# Altium PCB DRA818_Ham_module_3.PcbDoc
Units mil, origin at the board's own origin, x right, y up, seen from the top; angles counter-clockwise.
Board outline 3505 x 2360 mil, 4 copper layers (Component Side, Signal Layer 1, Power Plane, Solder Side), stack 33.234 mil thick; 78 components, 59 nets, 301 pads, 107 vias.
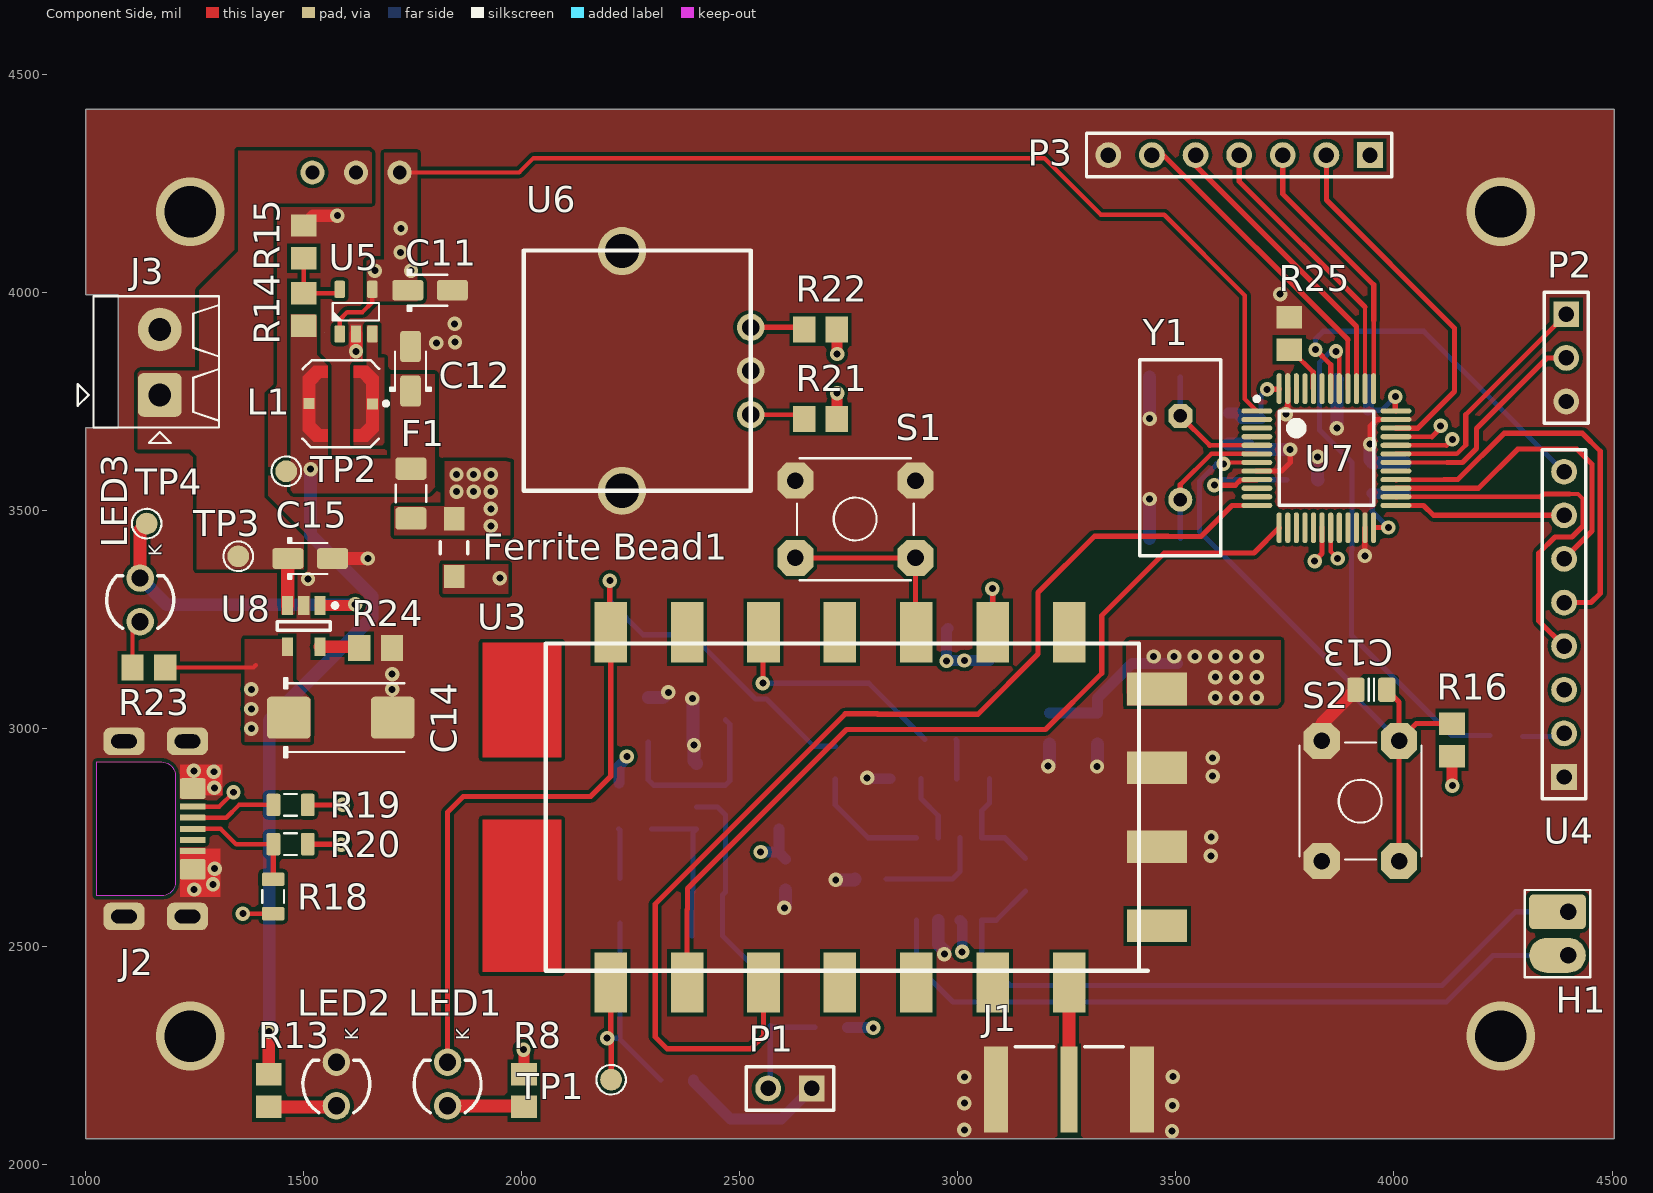
[diagram p0: Component Side view]
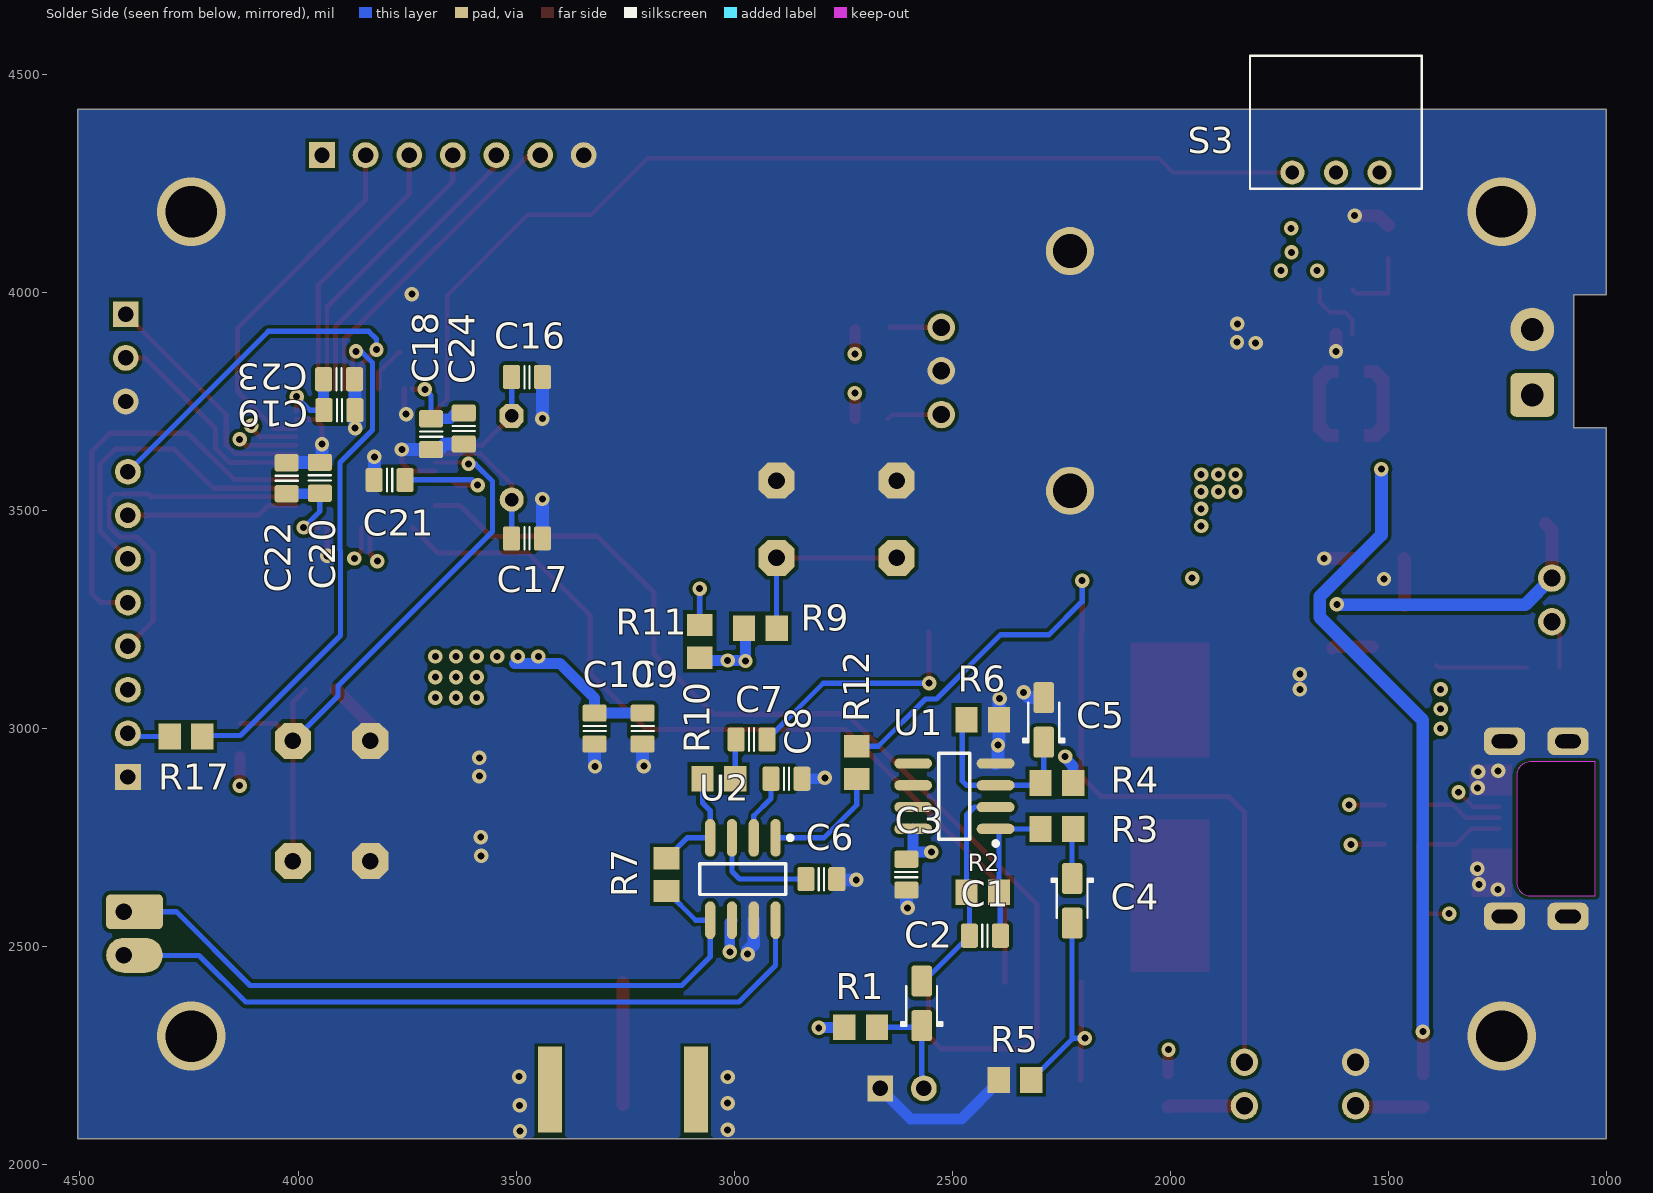
[diagram p1: Solder Side view, seen from below]
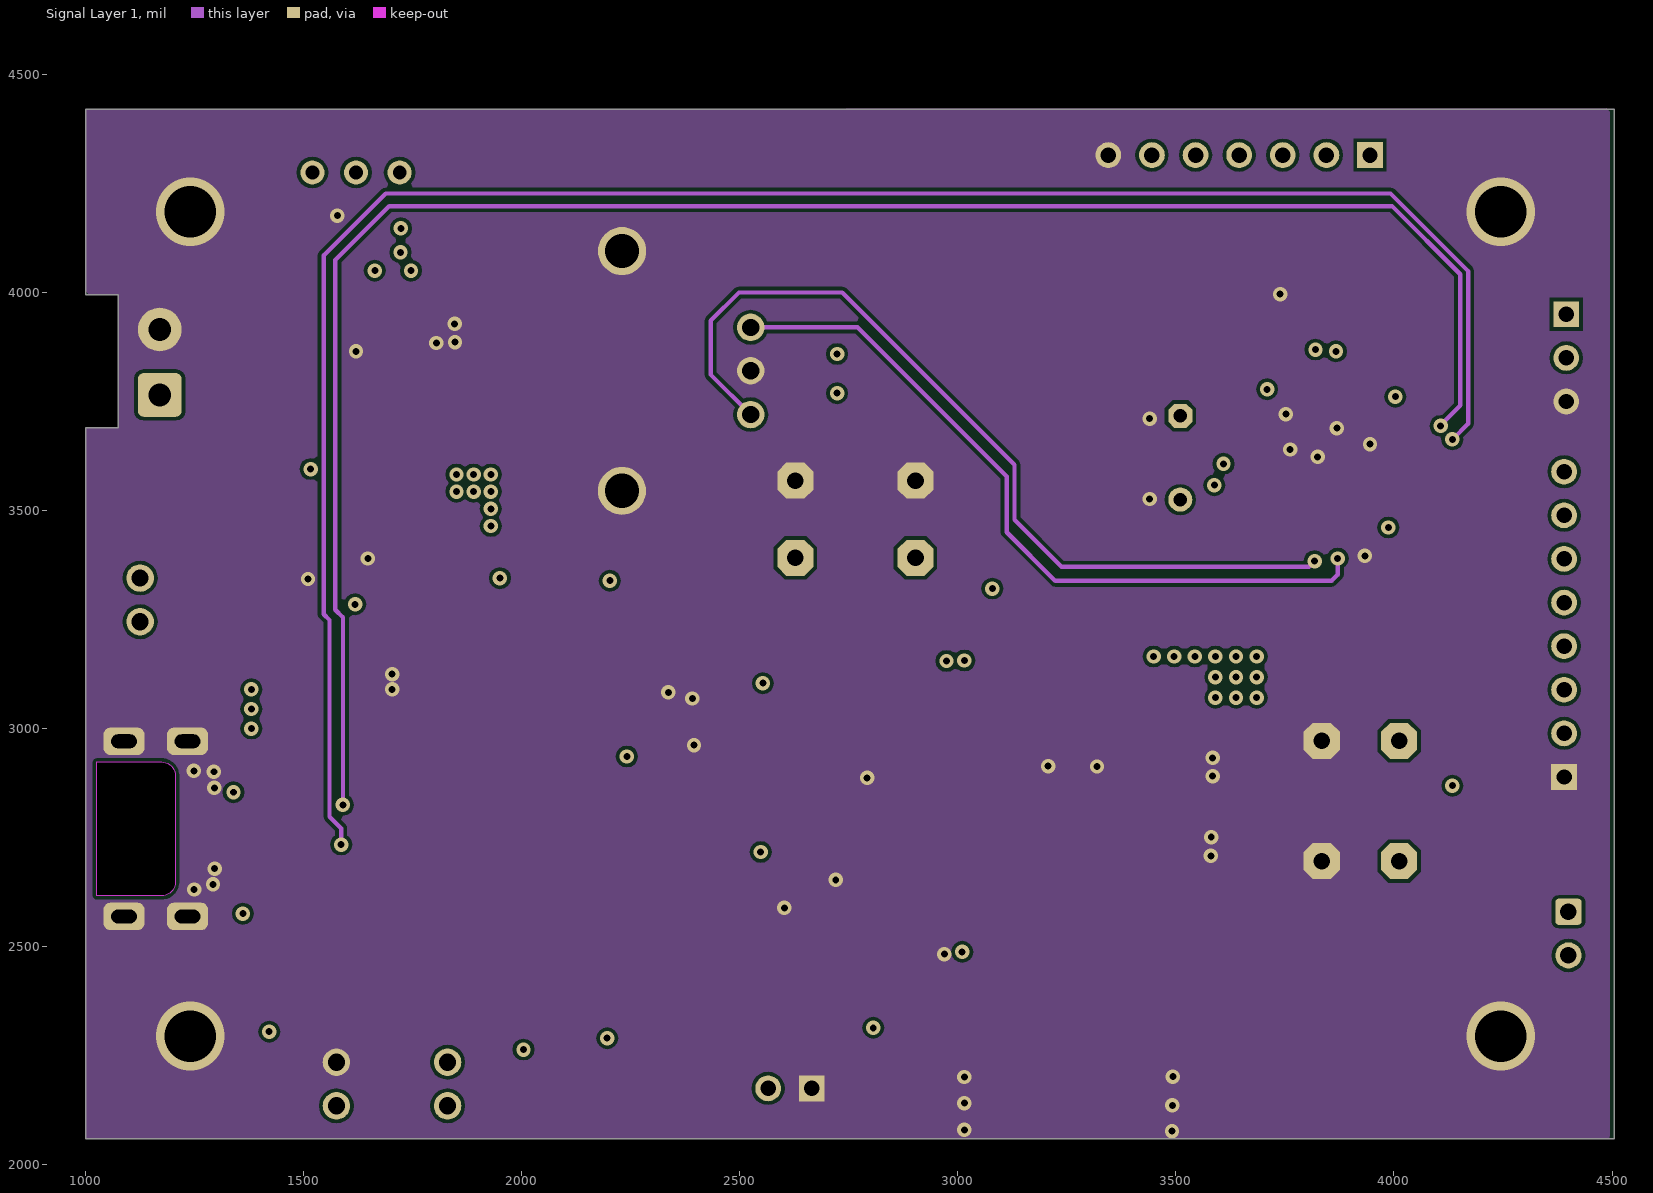
[diagram p2: Signal Layer 1]
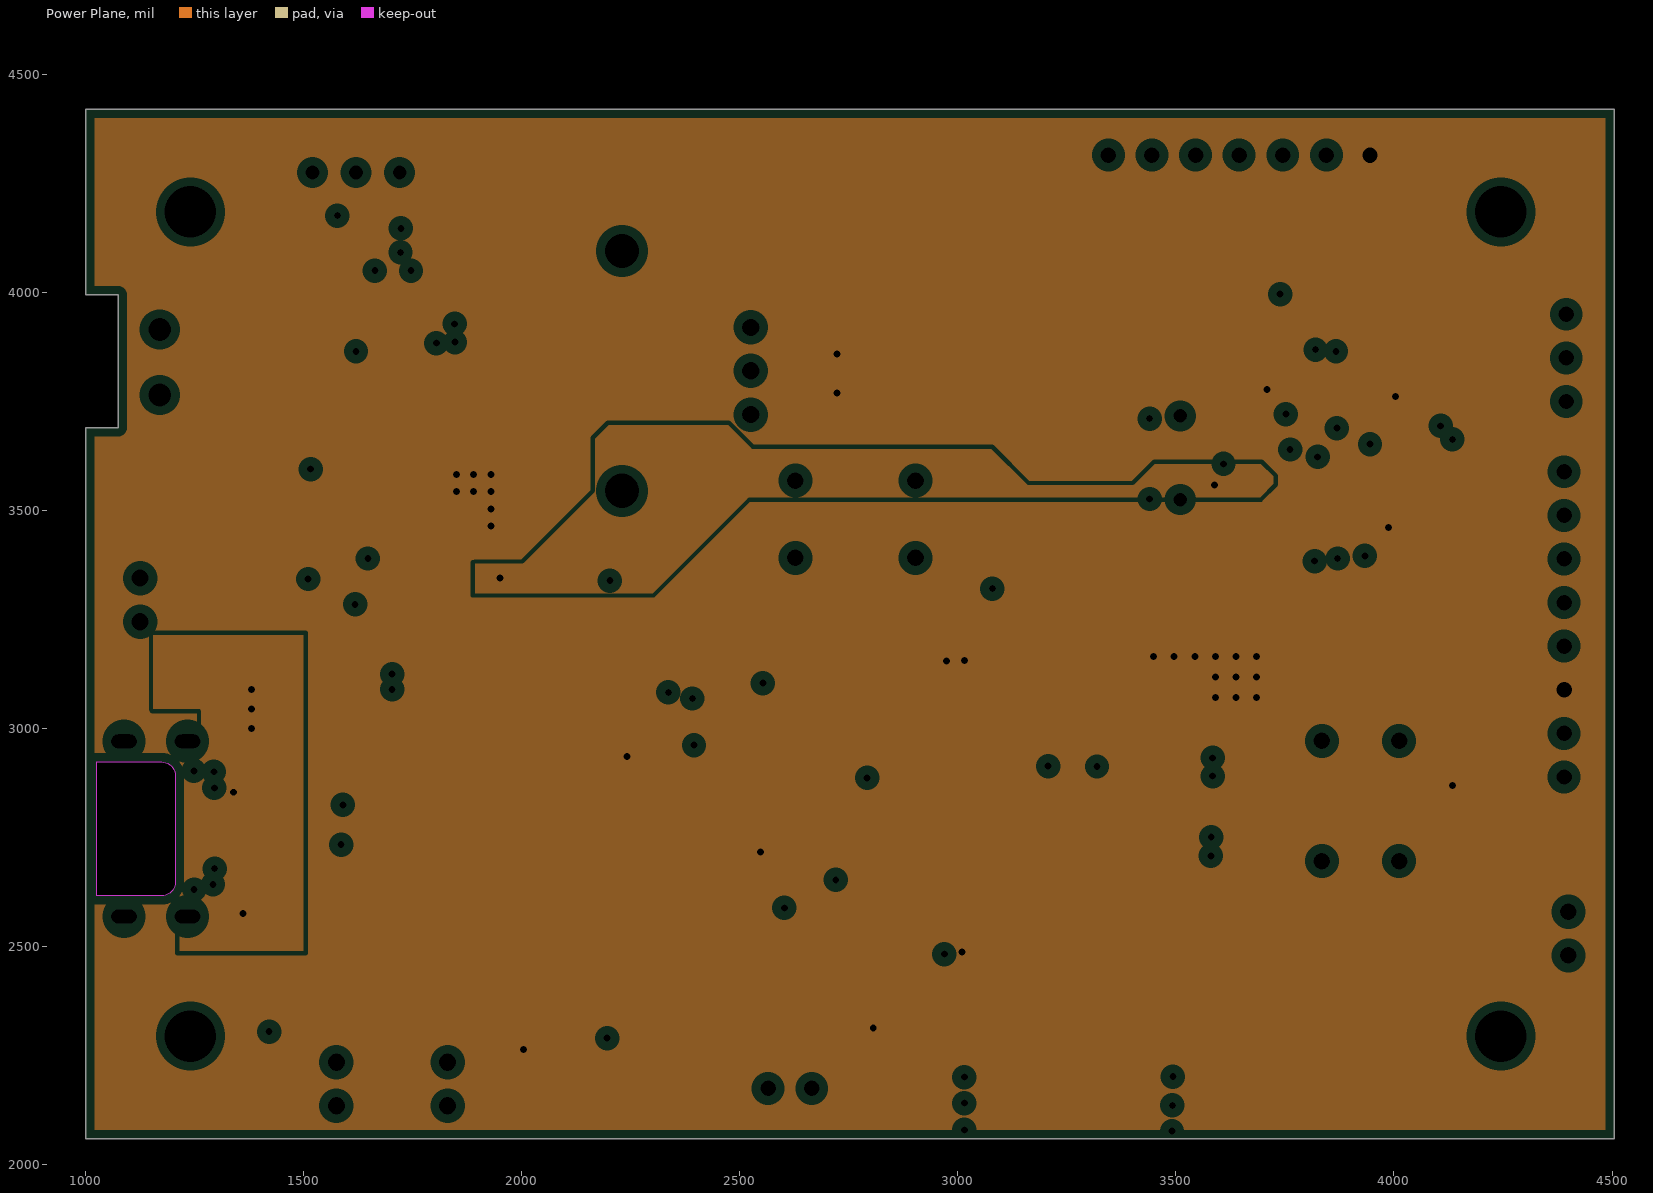
[diagram p3: Power Plane, clearances drawn from the general rule]
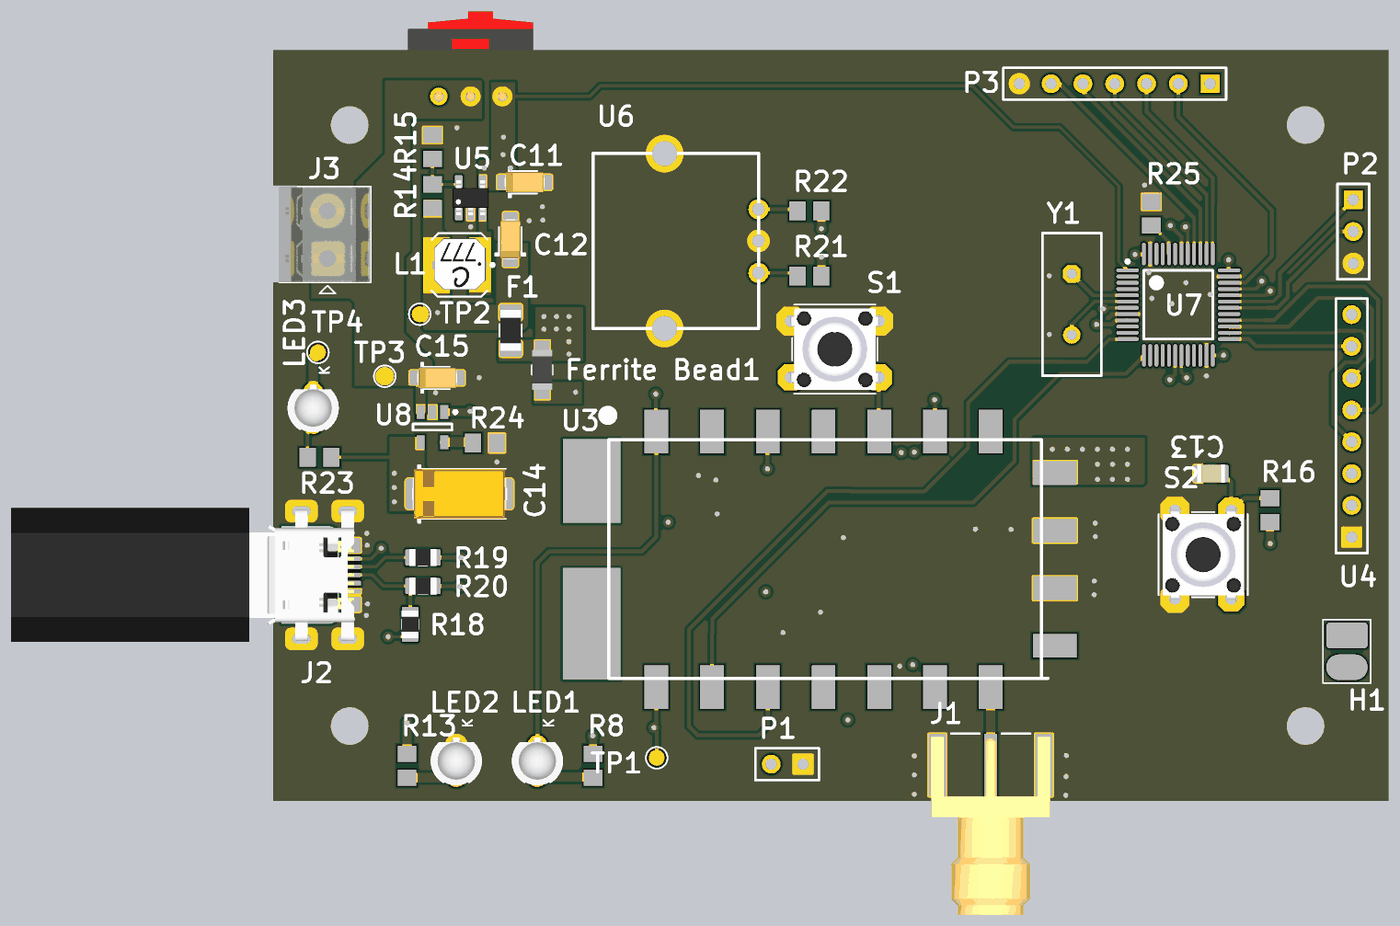
[diagram p4: 3D render of the assembled board from above, using the file's embedded part models]
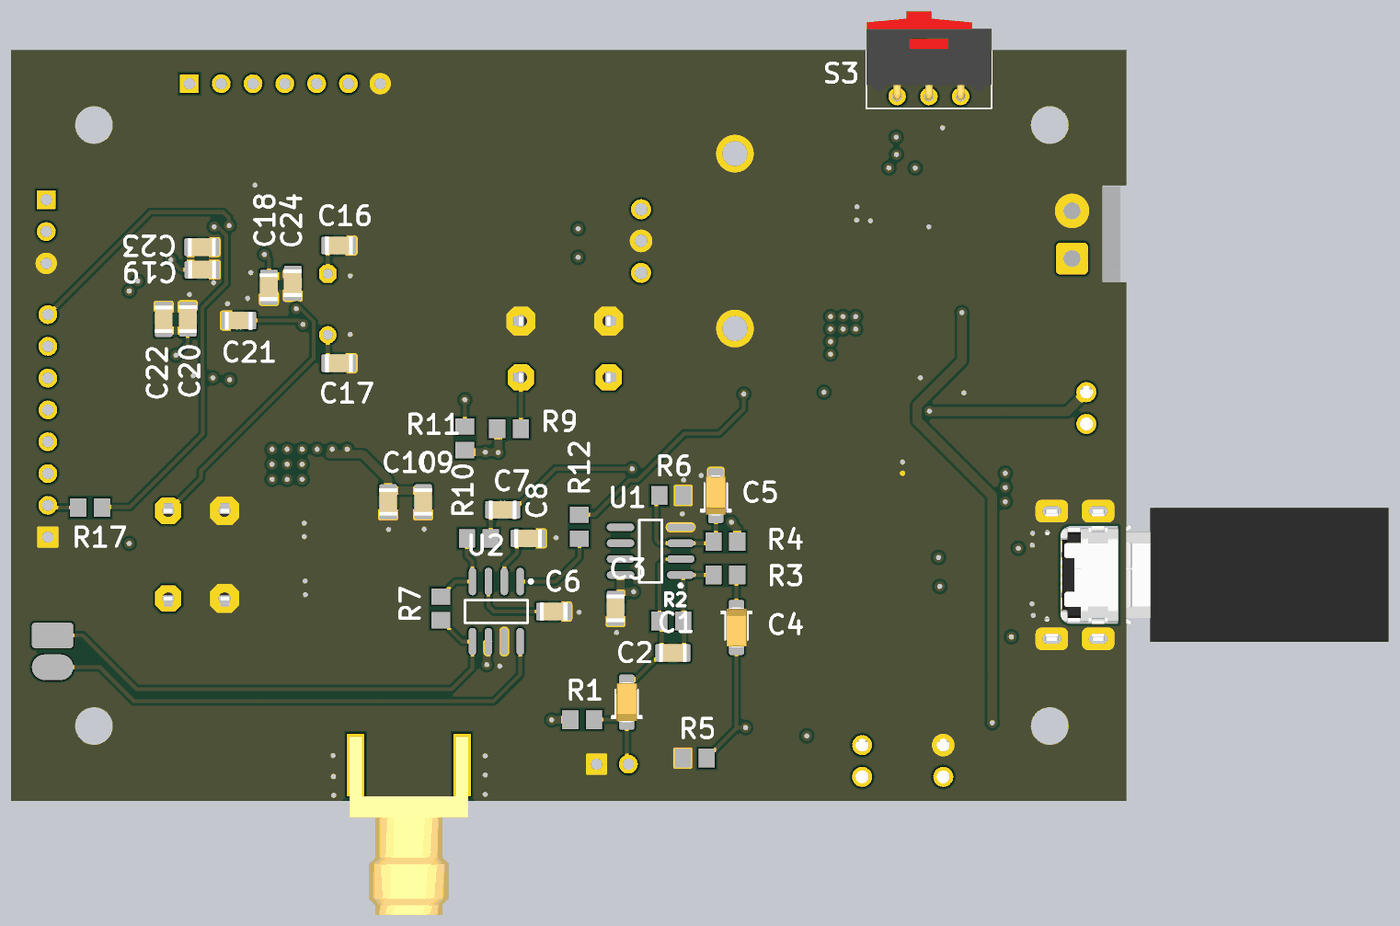
[diagram p5: 3D render of the assembled board from below, using the file's embedded part models]

## Layer stack, top to bottom
Top Solder: solder mask 0.4, Solder Resist, Dk 3.5
Component Side: signal copper 1.4
Dielectric 1: core 12.6, FR-4, Dk 4.8
Signal Layer 1: signal copper 1.417
Dielectric 3: prepreg 5, Dk 4.2
Power Plane: plane copper 1.417, net (Multiple Nets)
Dielectric 4: core 10, Dk 4.2
Solder Side: signal copper 1.4
Bottom Solder: solder mask 0.4, Solder Resist, Dk 3.5

## Board outline
1000,4420 4505,4420 4505,2060 1000,2060 1000,3690 1075,3690 1075,3845 1075,3995 1000,3995

## Design rules (kind name [scope] priority, off if disabled: settings)
Clearance [All] p1: gap=8 ignorepadtopadclearanceinfootprint=TRUE except(0: Arc-Hole Track-Hole SMDPad-Hole THPad-Hole Via-Hole Fill-Hole Poly-Hole Region-Hole Text-Hole)
PlaneClearance [All] p1: clearance=20
PlaneConnect [All] p1: planeconnectstyle=Direct reliefexpansion=20 reliefentries=4 reliefconductorwidth=10 reliefairgap=10
PolygonConnect [All] p1: connectstyle=Direct reliefconductorwidth=10 reliefentries=4 polygonreliefangle="90 Angle" airgapwidth=10
RoutingVias [All] p1: holewidth=28 width=50 viastyle="Through Hole" minholewidth=28 minwidth=50 maxholewidth=28 maxwidth=50
SolderMaskExpansion [All] p1: expansion=4
Width [All] p1: maxlimit=50 minlimit=10 preferedwidth=20 midlayer1_maxwidth=10 midlayer1_prefwidth=10 minimp=50.000000 maximp=50.000000 favimp=50.000000
28 further rules are at their usual default settings.

## Classes and differential pairs
component class MCU_and_Power_Mgmt: C11 C12 C13 C14 C15 C16 C17 C18 C19 C20 C21 C22 C23 C24 F1 "Ferrite Bead1" J2 J3 L1 LED2 LED3 P2 P3 R13 R14 R15 R16 R17 R18 R19 R20 R21 R22 R23 R24 R25 S2 S3 TP2 TP3 TP4 U4 U5 U6 U7 U8 Y1
component class DRA818V_transceiver_module: C1 C2 C3 C4 C5 C6 C7 C8 C9 C10 H1 J1 LED1 P1 PTT R1 R2 R3 R4 R5 R6 R7 R8 R9 R10 R11 R12 S1 TP1 U1 U2 U3

## Components (designator, comment, footprint, x,y, rotation, side; value= is the part's Value field where it differs from the comment)
C1 "approved sub OK" CAPC2012X135N 2425,2525 r180 bottom
C2 "4.7u" CAPMP3216X180N 2570,2370 r90 bottom
C3 "approved sub OK" CAPC2012X135N 2605,2665 r270 bottom
C4 "2.2u" CAPMP3216X180N 2225,2605 r270 bottom
C5 "2.2k" CAPMP3216X180N 2290,3020 r90 bottom
C6 "approved sub OK" CAPC2012X135N 2800,2655 r180 bottom
C7 "approved sub OK" CAPC2012X135N 2960,2975 r0 bottom
C8 "approved sub OK" CAPC2012X135N 2880,2885 r0 bottom
C9 "approved sub OK" CAPC2012X135N 3210,3000 r90 bottom
C10 "approved sub OK" CAPC2012X135N 3320,3000 r270 bottom
C11 "approved sub OK" CAPMP3216X180N 1790,4005 r0 top
C12 "approved sub OK" CAPMP3216X180N 1745,3825 r90 top
C13 "approved sub OK" CAPC2012X135N 3948,3089 r0 top
C14 "100u" CAPMP7343X310N 1585,3025 r0 top
C15 "approved sub OK" CAPMP3216X180N 1515,3390 r0 top
C16 "approved sub OK" CAPC2012X135N 3475,3806 r0 bottom
C17 "approved sub OK" CAPC2012X135N 3475,3436 r0 bottom
C18 "approved sub OK" CAPC2012X135N 3695,3675 r90 bottom
C19 "approved sub OK" CAPC2012X135N 3905,3730 r0 bottom
C20 "approved sub OK" CAPC2012X135N 3950,3575 r270 bottom
C21 "approved sub OK" CAPC2012X135N 3790,3570 r180 bottom
C22 "approved sub OK" CAPC2012X135N 4026,3574 r270 bottom
C23 "approved sub OK" CAPC2012X135N 3906,3801 r0 bottom
C24 "approved sub OK" CAPC2012X135N 3620,3688 r90 bottom
F1 "Slow-blow" RESC3216X70N 1746,3539 r270 top
"Ferrite Bead1" "2.2k@100MHz" "SMD 1206" 1845,3415 r270 top
H1 "Header" HDR_1x2_Offset 4400,2530 r0 top
J1 "32K145-400L5" ROS-32K145-400L5_V 3255,2074 r180 top
J2 "USB Micro Type B (recommended if hand soldering)" USB_Micro-B_FCI_SMD 1025,2770 r270 top
J3 "Stackable ScrewTerm" 2P_PCB_ScrewTerm_90S_3.81MM 1170,3765 r0 top
L1 "2.2uH" COILCRAFT_LPS4018 1585,3745 r180 top
LED1 "Super Red" "Type 3mm" 1830,2185 r90 top
LED2 "Super Red" "Type 3mm" 1575,2185 r90 top
LED3 "Super Red" "Type 3mm" 1125,3295 r90 top
P1 "Header 2" HDR1X2 2665,2175 r180 top
P2 "Programming port" HDR1X3 4395,3950 r270 top
P3 "JTAG" HDR1X7 3945,4315 r180 top
R1 "Thick Film" ERA-0805 2710,2315 r180 bottom
R2 "Thick Film" ERA-0805 2430,2625 r180 bottom
R3 "Jumper" ERA-0805 2260,2770 r180 bottom
R4 "Thick Film" ERA-0805 2260,2875 r0 bottom
R5 "Jumper" 6-0805 2356,2194 r0 bottom
R6 "Thick Film" ERA-0805 2430,3020 r180 bottom
R7 "Jumper" ERA-0805 3155,2665 r270 bottom
R8 "Jumper" ERA-0805 2005,2170 r90 top
R9 "Jumper" ERA-0805 2940,3230 r180 bottom
R10 "Jumper" ERA-0805 3035,2885 r0 bottom
R11 "Jumper" ERA-0805 3079,3200 r90 bottom
R12 "Jumper" ERA-0805 2719,2922 r90 bottom
R13 "Jumper" ERA-0805 1420,2170 r270 top
R14 "Jumper" ERA-0805 1500,3961 r90 top
R15 "Jumper" ERA-0805 1500,4116 r90 top
R16 "Jumper" ERA-0805 4133,2974 r90 top
R17 "Jumper" ERA-0805 4257,2982 r180 bottom
R18 "Thick Film" RESC2012X70N 1430,2615 r270 top
R19 "Thick Film" RESC2012X70N 1470,2825 r0 top
R20 "Thick Film" RESC2012X70N 1470,2735 r180 top
R21 "Jumper" ERA-0805 2685,3710 r180 top
R22 "Jumper" ERA-0805 2685,3915 r180 top
R23 "Jumper" ERA-0805 1145,3140 r0 top
R24 "Jumper" ERA-0805 1665,3185 r180 top
R25 "Jumper" ERA-0805 3760,3906 r270 top
S1 "SW_THT_PB_7.0mm" TACT-SWITCH-TS1170 2765,3480 r0 top
S2 "SW_THT_PB_7.0mm" TACT-SWITCH-TS1170 3923,2834 r90 top
S3 "450302014072" 450302014072 1620,4275 r180 bottom
TP1 "TESTPOINT" TP-R60 2205,2195 r0 top
TP2 "TESTPOINT" TP-R60 1460,3590 r270 top
TP3 "TESTPOINT" TP-R60 1350,3395 r90 top
TP4 "TESTPOINT" TP-R60 1140,3470 r90 top
U1 "LM358D" 751-02_N 2495,2845 r0 bottom
U2 "LM4871M/NOPB" M08A_N 2980,2655 r270 bottom
U3 "DRA818V" DRA818_BREAKOUT 2760,2835 r0 top
U4 "Nokia 5110" HDR1X8 4390,2889 r90 top
U5 "AP3418" SOT23-5 1620,3956 r90 top
U6 "EC12 Rotary encoder" EC12 2275,3820 r90 top
U7 "STM32F101CBT6" LQFP48_N 3845,3620 r0 top
U8 "MCP73831T-3ACI/OT" SOT-23-OT5_N 1500,3235 r270 top
Y1 "ECS-10-13-1" HC-49U 3510,3621 r270 top

## Footprints (in the part's own frame and the unit in brackets; to place one, negate y for a bottom-side part, rotate by r counter-clockwise, add the part's x,y. Pads: shape width x height; smd on the part's side, far side on the other; paste and mask are expansions set on the pad)
2P_PCB_ScrewTerm_90S_3.81MM [mil] "TERM BLOCK 2POS SIDE ENT STACKABLE 3.81MM"
  rrect25% 100x100 hole 52: 1(0,0)
  round 100 hole 52: 2(0,150)
  silkscreen extent -188,-110 136,226, body extent -152,-75 136,225, height 335
6-0805 [mm] "Chip Resistor; Body 2 x 1.2 mm (LxW typ)"
  rect 1.3x1.5 smd: 1(-0.95,0) 2(0.95,0)
751-02_N [mm] "SOIC, 8-Leads, Body 4.9x3.9mm, Pitch 1.27mm, IPC Medium Density"
  oval 2.2x0.6 smd: 1(-2.4,1.905) 2(-2.4,0.635) 3(-2.4,-0.635) 4(-2.4,-1.905) 5(2.4,-1.905) 6(2.4,-0.635) 7(2.4,0.635) 8(2.4,1.905)
  silkscreen extent -2.52,-2.5 0.9,2.88, body extent -1.95,-2.45 1.95,2.45, height 1.75
450302014072 [mm] "10mm*2.5mm. SPDT, ON-ON, 2.54mm, right-angle type, THT, bulk"
  round 1.4 hole 0.8: 1(0,0) 2(-2.54,0) 3(2.54,0)
  silkscreen extent -5,-0.95 5,6.8, body extent -5,-0.3 5,6.8, height 2.51
CAPC2012X135N [mm] "Chip Capacitor, Body 2.0x1.2mm, EIA 0805, IPC Medium Density"
  round 0.254 on Mech15: 0(0,0)
  rrect25% 1x1.4 smd: 1(-0.9,0) 2(0.9,0)
  Component Side pour cut-out: -0.675,0.7 -0.475,0.9 0.475,0.9 0.675,0.7 0.675,-0.7 0.475,-0.9 -0.475,-0.9 -0.675,-0.7
  silkscreen extent -0.15,-0.65 0.15,0.65, body extent -1.1,-0.72 1.1,0.73, height 1.34
CAPMP3216X180N [mm] "Capacitor, polarized, Molded Body, EIA 535BAAC size A; 3.20mm L X 1.60mm W X 1.80mm H"
  round 0.508 on Mech15: 0(0,0)
  rrect25% 1.8x1.2 smd: 1(-1.3,0) 2(1.3,0)
  silkscreen extent -1.3,-1.2 1,1.2, body extent -1.6,-0.8 1.6,0.8, height 1.8
CAPMP7343X310N [mm] "Molded body capacitor, Body 7.3x4.3mm, 2917, IPC Nominal settings"
  round 1 on Mech15: 0(0,0)
  rrect20% 2.55x2.45 smd: 1(-3.025,0) 2(3.025,0)
  silkscreen extent -3.3,-2.3 3.7,2.3, body extent -3.8,-1.97 3.8,1.98, height 3.1
COILCRAFT_LPS4018 [mil]
  rect 25x25 smd: 1(-73,1) 2(73,0)
  Component Side region: 30,87 62,87 87,62 87,-62 62,-87 30,-87 30,-59 45,-59 59,-45 59,45 45,59 30,59 30,87
  Component Side region: -30,87 -62,87 -87,62 -87,-62 -62,-87 -30,-87 -30,-59 -45,-59 -59,-45 -59,45 -45,59 -30,59 -30,87
  silkscreen extent -108,-100 88,100, body extent -82,-84 80,78, height 71
DRA818_BREAKOUT [mm]
  round 1.524 on Top Overlay: 0(-18,11.1)
  rect 1.9x3.5 smd: 1(-14.125,9.8) 2(-9.675,9.8) 3(-5.225,9.8) 4(-0.775,9.8) 5(3.675,9.8) 6(8.125,9.8) 7(12.575,9.8) 12(12.575,-10.6) 13(8.125,-10.6) 14(3.675,-10.6) 15(-0.775,-10.6) 16(-5.225,-10.6) 17(-9.675,-10.6) 18(-14.125,-10.6)
  rect 3.5x1.9 smd: 8(17.7,6.499) 9(17.7,1.9) 10(17.7,-2.701) 11(17.7,-7.301)
  Component Side region: -21.6,2.5 -17,2.5 -17,9.2 -21.6,9.2
  Component Side region: -21.6,-10 -17,-10 -17,-1.1 -21.6,-1.1
  silkscreen extent -17.92,-9.91 17.14,9.14, body extent -18.41,-9.91 17.14,9.14, height 3
EC12 [mm] "Rotary Encoder"
  round 1.6 hole 1: A(-2.54,-6.35) B(2.54,-6.35) C(0.015,-6.35)
  round 2.8 hole 2: sup1(-6.985,1.15) sup2(6.985,1.143)
  silkscreen extent -6.98,-6.35 7.01,6.86
ERA-0805 [mm] "Chip Resistor; Body 2 x 1.3 mm (LxW typ)"
  rect 1.3x1.5 smd: 1(-0.95,0) 2(0.95,0)
HC-49U [mm] "Quartz Crystal, Thru-Hole; 2 Leads; Body 11.35 x 4.65 x 13.46 mm (LxWxH max)"
  oct 1.4x1.4 hole 0.8: 1(-2.44,0)
  round 1.4 hole 0.8: 2(2.44,0)
  silkscreen extent -5.7,-2.35 5.7,2.35
HDR1X2 [mm] "Connector; Header; 2 Position"
  rect 1.5x1.5 hole 0.9: 1(0,0)
  round 1.5 hole 0.9: 2(2.54,0)
  silkscreen extent -1.27,-1.27 3.81,1.27
HDR1X3 [mm] "Connector; Header; 3 Position"
  rect 1.5x1.5 hole 0.9: 1(0,0)
  round 1.5 hole 0.9: 2(2.54,0) 3(5.08,0)
  silkscreen extent -1.27,-1.27 6.35,1.27
HDR1X7 [mm] "Connector; Header; 7 Position"
  rect 1.5x1.5 hole 0.9: 1(0,0)
  round 1.5 hole 0.9: 2(2.54,0) 3(5.08,0) 4(7.62,0) 5(10.16,0) 6(12.7,0) 7(15.24,0)
  silkscreen extent -1.27,-1.27 16.51,1.27
HDR1X8 [mm] "Connector; Header; 8 Position"
  rect 1.5x1.5 hole 0.9: 1(0,0)
  round 1.5 hole 0.9: 2(2.54,0) 3(5.08,0) 4(7.62,0) 5(10.16,0) 6(12.7,0) 7(15.24,0) 8(17.78,0)
  silkscreen extent -1.27,-1.27 19.05,1.27
HDR_1x2_Offset [mil]
  rrect25% 130x80 smd far side: 1(-25,50)
  rrect25% 130x80 smd: 1(-25,50)
  rrect25% 60x60 hole 38: 1(0,50)
  oval 130x80 smd far side: 2(-25,-50)
  oval 130x80 smd: 2(-25,-50)
  round 60 hole 38: 2(0,-50)
  silkscreen extent -100,-100 50,100
LQFP48_N [mm] "Thin QFP, 48-Leads, Body 7x7mm, Pitch 0.5mm, IPC Medium Density"
  oval 1.8x0.3 smd: 1(-4.05,2.75) 2(-4.05,2.25) 3(-4.05,1.75) 4(-4.05,1.25) 5(-4.05,0.75) 6(-4.05,0.25) 7(-4.05,-0.25) 8(-4.05,-0.75) 9(-4.05,-1.25) 10(-4.05,-1.75) 11(-4.05,-2.25) 12(-4.05,-2.75) 25(4.05,-2.75) 26(4.05,-2.25) 27(4.05,-1.75) 28(4.05,-1.25) 29(4.05,-0.75) 30(4.05,-0.25) 31(4.05,0.25) 32(4.05,0.75) 33(4.05,1.25) 34(4.05,1.75) 35(4.05,2.25) 36(4.05,2.75)
  oval 0.3x1.8 smd: 13(-2.75,-4.05) 14(-2.25,-4.05) 15(-1.75,-4.05) 16(-1.25,-4.05) 17(-0.75,-4.05) 18(-0.25,-4.05) 19(0.25,-4.05) 20(0.75,-4.05) 21(1.25,-4.05) 22(1.75,-4.05) 23(2.25,-4.05) 24(2.75,-4.05) 37(2.75,4.05) 38(2.25,4.05) 39(1.75,4.05) 40(1.25,4.05) 41(0.75,4.05) 42(0.25,4.05) 43(-0.25,4.05) 44(-0.75,4.05) 45(-1.25,4.05) 46(-1.75,4.05) 47(-2.25,4.05) 48(-2.75,4.05)
  silkscreen extent -4.17,-2.75 2.75,3.57, body extent -3.5,-3.5 3.5,3.5, height 1.6
M08A_N [mm] "SOIC, 8-Leads, Body 4.9x3.9mm, Pitch 1.27mm, IPC Medium Density"
  oval 2.2x0.6 smd: 1(-2.4,1.905) 2(-2.4,0.635) 3(-2.4,-0.635) 4(-2.4,-1.905) 5(2.4,-1.905) 6(2.4,-0.635) 7(2.4,0.635) 8(2.4,1.905)
  silkscreen extent -2.52,-2.5 0.9,2.88, body extent -2,-2.5 2,2.5, height 1.75
RESC2012X70N [mm] "Chip Resistor, Body 2.0x1.2mm, EIA 0805, IPC Medium Density"
  round 0.254 on Mech15: 0(0,0)
  rrect25% 0.8x1.3 smd: 1(-1,0) 2(1,0)
  Component Side pour cut-out: -0.725,0.65 -0.525,0.85 0.525,0.85 0.725,0.65 0.725,-0.65 0.525,-0.85 -0.525,-0.85 -0.725,-0.65
  silkscreen extent -0.38,-0.64 0.38,0.64, body extent -1.1,-0.67 1.1,0.68, height 0.69
RESC3216X70N [mm] "Chip Resistor, Body 3.2x1.6mm, EIA 1206, IPC Medium Density"
  round 0.508 on Mech15: 0(0,0)
  rrect25% 1.3x1.8 smd: 1(-1.45,0) 2(1.45,0)
  silkscreen extent -0.51,-0.89 0.51,0.89, body extent -1.62,-0.82 1.63,0.83, height 0.69
ROS-32K145-400L5_V [mm] "SMA Right Angle Jack, Edge Mount, 14.25x9.5x4.46mm, Rosenberger Recommended"
  rect 1x5 smd: 1(0,-2.5)
  rect 1.4x5 smd: MP(-4.25,-2.5) MP(4.25,-2.5)
  rect 1.4x5 smd far side paste-2: ""(-4.25,-2.5) ""(4.25,-2.5)
  silkscreen extent -3.15,-5 3.15,-5, body extent -4.75,-4.75 4.75,9.5, height 4.46
"SMD 1206" [mm] "Chip Inductor, 2-Leads, Body 3,2x1,6mm"
  rect 1.35x1.2 smd: 1(-1.675,0) 2(1.675,0)
  silkscreen extent -0.35,-0.8 0.35,0.8, body extent -1.6,-0.8 1.6,0.8, height 1.09
SOT23-5 [mm]
  round 0.5 on Mech15: 0(0,0)
  rrect25% 1x0.6 smd: 1(-1.3,0.95) 2(-1.3,0) 3(-1.3,-0.95) 4(1.3,-0.95) 5(1.3,0.95)
  silkscreen extent -0.51,-1.35 0.51,1.35, body extent -1.4,-1.45 1.4,1.45, height 1.44
SOT-23-OT5_N [mm] "SOT23, 5-Leads, Body 2.9x1.6mm, Pitch 0.95mm, Lead Span 2.7mm, IPC Medium Density"
  rect 1.1x0.65 smd: 1(-1.2,0.95) 2(-1.2,0) 3(-1.2,-0.95) 4(1.2,-0.95) 5(1.2,0.95)
  silkscreen extent -1.32,-1.55 0.25,1.95, body extent -0.9,-1.55 0.9,1.55, height 1.45
TACT-SWITCH-TS1170 [mm] "Bondtact sealed TH tact switch"
  round 0.508 on Mech15: 0(0,0)
  oct 2.1x2.1 hole 0.965: 1(-3.5,-2.25) 1(3.5,-2.25) 2(-3.5,2.25) 2(3.5,2.25)
  silkscreen extent -3.4,-3.56 3.4,3.56, body extent -4.13,-3.25 4.13,3.25, height 7
TP-R60 [mil]
  round 50 smd paste-50: 1(0,0)
  silkscreen extent -34,-34 34,34, body extent -30,-30 30,30, height 10
"Type 3mm" [mm] "THT, LED-3mm, 2pin- Body 4.15mm(max)"
  round 1.6 hole 1: 1(1.27,0) 2(-1.27,0)
  silkscreen extent -1.66,-1.95 1.4,1.95, body extent -1.93,-1.94 1.87,1.94, height 10.5
USB_Micro-B_FCI_SMD [mm]
  round 0.508 on Mech15: 0(0,0)
  rrect20% 0.35x1.5 smd: 1(-1.3,5.6) 2(-0.65,5.6) 3(0,5.6) 4(0.65,5.6) 5(1.3,5.6)
  rrect50% 1.6x2.4 hole 0.8 slot 1.5 at 90 deg: SH(-5.1,5.3) SH(-5.1,1.6) SH(5.1,5.3) SH(5.1,1.6)
  rrect20% 1.2x1.5 smd: SH(-2.35,5.6) SH(2.35,5.6)
  Keep-Out Layer board cut-out: -3.9,0 -3.9,3.797 -3.839,4.103 -3.666,4.362 -3.406,4.536 -3.1,4.597 -3.1,4.597 3.1,4.597 3.406,4.536 3.666,4.362 3.839,4.103 3.9,3.797 3.9,3.797 3.9,0
  body extent -5.35,-21.58 5.35,5.8, height 4.67

## Part data
C1 C3 C6 C7 C8 C9 C10: library part CAPC_100n_0805_X7R_100V_10%, "Capacitor SMD Cer 100nF 10% 100V X7R 0805"
C2 C4 C5: library part CAPT_33u_3216_6V3, "Capacitor SMD Tantalum 33uF 10% 6.3V 3216-18"
C11 C12 C15: library part CAPC_4u7_0805, "Capacitor SMD Cer 4.7uF 10% 16V X5R 0805"
C13 C16 C17 C18 C19 C20 C21 C22 C23 C24: library part CAPC_10u_0805_10V, "Capacitor SMD Cer 10uF 10% 10V X5R 0805"
C14: library part CAPT_330u_2917_6V3, "Capacitor SMD Tant 330uF 20% 6V3 2917"
F1: library part FUSE_160mA_1206, "Fuse 160mA 63VDC 1206 SMD"
"Ferrite Bead1": library part "WE-CBF 1206, 7427921", "SMD EMI Suppression Ferrite Beads WE-CBF, Z= 32 Ohm"
H1: library part Header2P, "Header, 2-pin"
J1: "SMA Right Angle Jack, Edge Mount, Up to 18 GHz, -55 to 155 degC"
J2: library part USB_Micro_TypeB_FCI, "Connector SMD-THD USB Micro Type B middle mount"
J3: library part 2P_ScrewTerm_90S_3.81MM, "Terminal Block Screw Type THT 2-Position 3.81mm pitch"
L1: library part 370, "IND 1800uH +/-20% 0.070A 31.5oh LPS4018"
LED1 LED2 LED3: library part "WL-TMRW, Type 3mm, 151031SS04000", "THT LED round mono-color color lens, WL-TMRW, Super Red"
P1: "Header, 2-Pin"
P2: library part "Header 3", "Header, 3-Pin"
P3: library part "Header 7", "Header, 7-Pin"
R1: library part RES_1K3_0805_1%, "Resistor SMD chip 1.3k Ohm 0.125W 1% 0805"
R2: library part RES_7K87_0805_1%, "Resistor SMD chip 7.87k Ohm 0.125W 1% 0805"
R3 R5 R7 R8 R9 R10 R11 R12 R13 R14 R15 R16 R17 R21 R22 R23 R24 R25: library part RES_0R_0805, "Resistor SMD chip 0.0 Ohm 0.125W 0805"
R4 R6: library part RES_100K_0805_1%, "Resistor SMD chip 100k Ohm 0.125W 1% 0805"
R18 R19 R20: library part RES_100R_0805_1%, "Resistor SMD chip 100 Ohm 0.125W 1% 0805"
S1 S2: "Switch, tact, 7.0mm stem"
S3: library part "WS-SLTU, 450302014072", "WS-SLTU 10x2.5 mm THT right angled"
TP1 TP2 TP3 TP4: "SMD test pin"
U1: "Dual Low-Power Operational Amplifier"
U2: "3W Audio Power Amplifier with Shutdown Mode, 8-pin Narrow SOIC, Pb-Free"
U4: "Nokia 5110 LCD module"
U5: "DC/DC buck converter"
U6: library part "EC12 Rotary Encoder"
U7: "STM32 ARM-based 32-bit MCU with 128 Kbytes Flash, 48-pin LQFP, Industrial Temperature"
U8: "Miniature Single-Cell, Fully Integrated Li-Ion, Li-Polymer Charge Management Controller, 4.35V, 5-Pin SOT-23, Industrial Temperature, Tape and Reel"
Y1: "Crystal Oscillator"

## Via types
v1: diameter 33, hole 16, Component Side to Solder Side, tented both sides, 83 vias
v2: diameter 32.99, hole 16, Component Side to Solder Side, tented both sides, 12 vias
v3: diameter 32.99, hole 16, Component Side to Solder Side, 8 vias
v4: diameter 157.48, hole 118.11, Component Side to Solder Side, tented both sides, 4 vias

## Nets (pads, with @x,y where several pads share a name; then routed paths per layer and width w, separated by ;. In a path a pad name is that pad's centre, name@x,y a point inside that pad or via, vN(x,y) a via of type N, cw(c..) or ccw(c..) an arc to the next point about the centre after c; other vN are vias at no path point)
3.3V: "Ferrite Bead1.1" C3.1 C9.2 C10.1 C18.2 C19.2 C20.2 C22.2 C23.2 C24.2 F1.2 P3.1 R1.1 R4.1 R8.2 R9.1 R11.1 R16.1 R21.1 R22.1 U1.8 U2.6 U3.8 U4.3 U7.24 U7.36 U7.48 | length 1673.2
  Component Side w12: v1(3709,3778) 3735.28,3778 U7.48 ; U7.24 3953.72,3461 v1(3987,3461) ; v1(4003,3761) 4003,3729.72 U7.36
  Component Side w25: v1(2004,2264) 2005,2263 R8.2 ; R21.1 2723,3710.6 v1(2723,3769) ; R22.1 2723,3914.4 v1(2723,3859) ; R16.1 4133,2870 v1(4134,2869)
  Solder Side w12: C18.2 3695,3764 v1(3709,3778) ; C19.2 3972,3730 v1(4003,3761) ; C20.2 3950,3498 v1(3987,3461)
  Solder Side w25: R4.1 2222.6,2914.6 2241,2933 v1(2241,2936) ; v1(2548,2717) 2588.43,2717 C3.1@2589.49,2715.94 ; U1.8 C3.1@2589.49,2715.94 ; C3.1 C3.1@2589.49,2715.94 ; R1.1 2805,2315 v1(2806,2314) ; R9.1 2974,3226.6 v1(2974,3155) 2975,3156 v1(3015,3156) 3072.4,3156 R11.1 ; U2.6 3010,2555.51 v1(3010,2488) ; C9.2 C10.1 3320,3070 3399.61,3149.61 3503.94,3149.61 ; C24.2 3638.7,3723.43 3651.7,3710.43 C18.2 ; C19.2 3941.43,3731 C23.2 ; C20.2 3951,3538.57 C22.2
  other v2: 3590.55,3070.87 3637.8,3070.87 3685.04,3070.87 3590.55,3118.11 3637.8,3118.11 3685.04,3118.11 3448.82,3165.35 3496.06,3165.35 3543.31,3165.35 3590.55,3165.35 3637.8,3165.35 3685.04,3165.35
  other v3: 1929.13,3464.57 1929.13,3503.94 1850.39,3543.31 1889.76,3543.31 1929.13,3543.31 1850.39,3582.68 1889.76,3582.68 1929.13,3582.68
3.3V_A: "Ferrite Bead1.2" C21.2 U7.9 | length 275.2
  Component Side w12: v1(3588,3558) 3636.18,3558 3648.19,3570.01 3684.35,3570.01 3685.34,3571 U7.9
  Solder Side w12: v1(3588,3558) 3600.79,3570.79 3753.78,3570.79 C21.2
  other v1: 1950,3345
AF: C7.1 U3.3 | length 542.4
  Component Side w12: v1(2553,3104) 2553,3219.54 U3.3
  Solder Side w12: v1(2553,3104) 2795.57,3104 C7.1
BOOT0: R25.2 U7.44 | length 105.3
  Component Side w10: R25.2@3768.9,3862.6 3814.69,3816.81
  Component Side w12: R25.2@3766,3862.6 R25.2@3768.9,3862.6 ; 3814.69,3816.81 3814.69,3780.23 U7.44
D+: R19.2 U7.33 | length 4531.5
  Component Side w10: U7.33 4087.21,3669.21
  Component Side w12: R19.2 v1(1590,2825) v1@1593,2822 ; 4087.21,3669.21 4107,3689 v1(4107,3694)
  Signal Layer 1 w10: v1(1590,2825) 1590,3254.94 1572.5,3272.44 1572.5,4074.5 1696,4198 3995.59,4198 4152,4041.59 4152,3741 4109,3698 v1@4117,3690 ; v1(4107,3694) v1@4113,3694
D-: R20.1 U7.32 | length 4737.2
  Component Side w10: U7.32 4120.53,3649.53
  Component Side w12: R20.1 1585,2735 v1(1586,2734) ; 4120.53,3649.53 v1(4134,3663)
  Signal Layer 1 w10: v1(1586,2734) 1586,2771 1559.16,2797.84 1559.16,3248.84 1546,3262 1546,4085 1688,4227 3992.04,4227 4170,4049.04 4170,3699 v1(4134,3663)
GND: C3.2 C5.2 C6.2 C8.1 C9.1 C10.2 C11.2 C12.2 C13.1 C14.2 C15.2 C16.1 C17.1 C18.1 C19.1 C20.1 C21.1 C22.1 C23.1 C24.1 J1.MP J2.5 J2.SH J3.2 LED2.1 P1.1 P2.3 P3.7 R5.2 R6.2 R15.2 R24.1 R25.1 S1.2 S2.2 U1.4 U2.7 U3.9 U3.10 U4.1 U5.2 U6.C U6.sup1 U6.sup2 U7.8 U7.23 U7.35 U7.47 U8.2 | length 2190.8
  Component Side w12: U7.8 3742.47,3590.47 3762,3610 v1(3762,3640) ; v1(3752,3721) 3756.42,3725.42 U7.47 ; v1(3933,3396) 3933,3459.97 U7.23 ; v1(3945,3652) 3945,3693 3960.58,3708.58 U7.35
  Component Side w29.53: R15.2 1522.6,4176 v1(1577,4176) ; C15.2 v1(1647,3390) ; v1(1620,3865) U5.2 ; S2.2@3834.42,2971.8 3834.42,3010.85 C13.1
  Solder Side w25: R5.2 2393.4,2190.6 2479,2105 2595,2105 P1.1 ; v1(2792,2887) 2794,2885 C8.1
  Solder Side w29.53: C5.2 2324.18,3071.18 v1(2336,3083) ; v1(2391,3069) 2392.6,3067.4 R6.2 v1@2392.6,2964.4 ; v1(2395,2962) 2395,2925.51 U1.4 ; v1(2602,2589) 2605,2592 C3.2 ; v1(2720,2653) 2762.57,2653 C6.2 ; U2.7 2955,2505 2969,2491 v1(2969,2483) ; v1(3207,2914) 3210,2917 C9.1 ; v1(3319,2913) 3320,2914 C10.2 ; C17.1 v1(3439.57,3526.43) ; v1(3439.57,3710.57) C16.1 ; C24.1 3663.3,3652.57 3676.3,3639.57 C18.1 3761.57,3639.57 v1(3762,3640) ; v1(3825,3623) 3825,3570.43 C21.1 ; v1(3869,3689) 3869,3727.43 3868,3728.43 C19.1 3869.57,3800 C23.1 ; v1(3945,3652) 3945,3615.43 C20.1 4025,3610.43 C22.1
  other v1: 3491,2077 3015,2080 3492,2136 3015,2141 3015,2201 3493,2202 1249,2631 1292,2643 1296,2679 3580,2708 3581,2751 1295,2864 3584,2891 1294,2901 1248,2903 3584,2933 1703,3090 1703,3125 1510,3343 1804,3884 1847,3886 1846,3928 3739,3996
  other v4: 1240,2295 4245,2295 1240,4185 4245,4185
HL: U3.7
JTCK: P3.3 U7.37 | length 621.9
  Component Side w10: U7.37 3953.27,3936.34
  Component Side w12: P3.3 3745,4226 3953.58,4017.42 3953.58,3936.34
JTDI: P3.4 U7.38 | length 655.1
  Component Side w10: U7.38 3933.58,3966.42
  Component Side w12: P3.4 3645,4255 3933.58,3966.42
JTDO: P3.5 U7.39 | length 688.4
  Component Side w12: P3.5 3545,4290.87 3913.9,3921.97 U7.39
JTMS: P3.2 U7.34 | length 833.2
  Component Side w12: P3.2 3845,4212 4139,3918 4139,3773 4054.9,3688.9 U7.34
JTRST#: P3.6 U7.40 | length 736.9
  Component Side w10: U7.40 3894.21,3891.79
  Component Side w12: P3.6 3471,4315 3894.21,3891.79
LCD_DC: U4.6 U7.27 | length 744.8
  Component Side w12: U7.27@4004.45,3551.01 4194.01,3551.01 4284,3641 4419,3641 4454,3606 4454,3453 U4.6
LCD_LIGHT: R17.2 U7.41 | length 1204.8
  Component Side w10: U7.41 v1@3874.53,3857.47
  Component Side w12: v1(3867,3865) v1@3874.53,3857.47
  Solder Side w12: v1(3867,3865) 3855,3865 3829,3839 3829,3685 3904,3610 3904,3410.13 3902.5,3408.63 3902.5,3213.5 4132,2984 4151,2984 ; 4153,2984 R17.2@4219.6,2984
LCD_MOSI: U4.5 U7.28 | length 948.2
  Component Side w10: U7.28 4114.79,3570.79
  Component Side w12: U7.28 U7.28@4005.23,3570.01 ; 4114.79,3571.01 4146.29,3571.01 4252.28,3677 4432,3677 4473,3636 4473,3310 4452,3289 U4.5
LCD_RESET#: U4.8 U7.42 | length 838.8
  Component Side w12: v1(3820,3869) 3854.84,3834.16 U7.42
  Solder Side w12: v1(3820,3869) 3820,3893 3838,3911 4068,3911 U4.8
LCD_SCK: U4.4 U7.26 | length 863.1
  Component Side w10: U7.26 4336.42,3531.42 ; 4402,3538 4422,3538 4432.53,3527.47 4432.53,3463.53
  Component Side w12: U7.26 U7.26@4005.13,3530.73 ; 4336.42,3531.42 4343,3538 4402,3538 ; U4.4 4332,3247 4332,3402 4369,3439 4408,3439 4432.53,3463.53
LCD_SS: U4.7 U7.25 | length 395
  Component Side w12: U7.25 4067.7,3511.73 4090.43,3489 U4.7
MIC_IN: C4.2 R5.1 TP1.1 U3.18 | length 658.3
  Component Side w12: U3.18 2203.9,2297.9 v1(2196,2290) 2205,2281 TP1.1
  Solder Side w12: v1(2196,2290) 2222.6,2290 2225,2287.6 ; C4.2 2225,2287.6 ; R5.1 2225,2287.6
NetC1_1: C1.1 C2.2 R2.1 U1.2 | length 506.6
  Solder Side w12: U1.2 2449,2820 2467.4,2801.6 R2.1 2460.43,2618.03 C1.1 2564.25,2421.18 C2.2
NetC1_2: C1.2 R2.2 R3.1 U1.1 | length 352.6
  Solder Side w12: R3.1 U1.1 2392.6,2762.09 R2.2 2389.57,2621.97 C1.2
NetC2_1: C2.1 P1.2 R1.2 | length 250.1
  Solder Side w12: P1.2 2570,2180 C2.1 2573.82,2315 R1.2
NetC4_1: C4.1 R3.2 | length 114.8
  Solder Side w12: R3.2 2225,2767.6 C4.1
NetC5_1: C5.1 R4.2 R6.1 U1.3 | length 426.7
  Solder Side w12: C5.1 2290,2882.4 R4.2 2302.4,2870 U1.3 2467,2870 2477,2880 2477,3010.4 R6.1
NetC6_1: C6.1 U2.3 | length 254.1
  Solder Side w12: C6.1 2988,2655 3005,2672 U2.3
NetC7_2: C7.2 R10.1 | length 90.9
  Solder Side w12: C7.2 2997.6,2972.83 R10.1
NetC8_2: C8.2 U2.2 | length 151.9
  Solder Side w12: C8.2 2915.43,2839.57 2955,2800 U2.2
NetC12_1: C12.1 F1.1 L1.2 R13.1 R14.1 TP2.1 | length 1544.4
  Component Side w29.53: R13.1 1420,2304 v1(1421,2305)
  Solder Side w29.53: v1(1421,2305) 1421,3019 1657.26,3255.26 1657.26,3302.74 1516,3444 v1(1516,3595)
NetC15_1: C15.1 J3.1 S3.1 TP3.1 U8.3 | length 108.3
  Component Side w29.53: U8.3 1462.6,3388.78 C15.1
NetC16_2: C16.2 U7.5 Y1.1 | length 292.6
  Component Side w10: 3577.54,3649.53 U7.5
  Component Side w12: Y1.1 3577.54,3649.53
  Solder Side w12: Y1.1 3510,3805.57 C16.2
NetC17_2: C17.2 U7.6 Y1.2 | length 328.1
  Component Side w10: 3510,3559 3580.84,3629.84 U7.6
  Component Side w12: Y1.2 3510,3559
  Solder Side w12: Y1.2 3510,3436.43 C17.2
NetH1_1: H1.1 R7.2 U2.5 | length 1654.2
  Solder Side w12: R7.2 3087.91,2560.51 U2.5 3055,2476 3120,2411 4110,2411 4279,2580 4375,2580 H1.1@4400,2580
NetH1_2: H1.2 U2.8 | length 1677.6
  Solder Side w12: U2.8 2905,2457 2989,2373 4120,2373 4227,2480 4375,2480 H1.2@4400,2480
NetJ2_2: J2.2 R19.1 | length 197.3
  Component Side w10: J2.2 1322.31,2795.59 1351.72,2825 R19.1
NetJ2_3: J2.3 R18.1 R20.2 | length 280.5
  Component Side w10: J2.3 1310,2770 1345,2735 R20.2
  Component Side w12: R18.1 1430,2734.37 R20.2
NetL1_1: L1.1 U5.3
NetLED1_2: LED1.2 R8.1 | length 176
  Component Side w29.53: LED1.2 2002.6,2135 R8.1
NetLED2_2: LED2.2 R13.2 | length 156
  Component Side w29.53: R13.2 1572.6,2132.6 LED2.2
NetLED3_1: LED3.1 TP4.1 U8.1 | length 731.2
  Component Side w25: U8.1 1615.24,3282.24 v1(1618,3285)
  Component Side w29.53: LED3.1 1125,3455 TP4.1
  Solder Side w29.53: LED3.1 1186,3284 v1@1618,3284
NetLED3_2: LED3.2 R23.1 | length 112.2
  Component Side w10: R23.1 1107.6,3227.6 LED3.2
NetR7_1: R7.1 R10.2 U2.4 | length 262.2
  Solder Side w12: R10.2 3072.4,2829.4 3055,2812 U2.4 3107.91,2749.49 R7.1
NetR12_1: R12.1 U2.1 | length 276.9
  Solder Side w12: R12.1 2719,2825 2794.51,2749.49 U2.1
NetR14_2: R14.2 R15.1 U5.5 | length 166.4
  Component Side w10: R15.1 R14.2 1573.82,3998.4 U5.5
NetR17_1: R17.1 U4.2 | length 98.5
  Solder Side w12: R17.1 4383,2982 U4.2
NetR21_2: R21.2 U6.A U7.18 | length 2215.2
  Component Side w10: U6.A 2637.6,3720 R21.2
  Component Side w12: v1(3818,3384) 3835.16,3401.16 U7.18
  Signal Layer 1 w10: U6.A 2433,3812 2433,3935 2498,4000 2734.74,4000 3130,3604.74 3130,3478.74 3237.74,3371 3805,3371 v1(3818,3384)
NetR22_2: R22.2 U6.B U7.19 | length 1899.3
  Component Side w10: U7.19 3854.84,3406.16 v1(3871,3390)
  Component Side w12: U6.B R22.2@2642.6,3920
  Signal Layer 1 w10: U6.B 2770,3920 3112,3578 3112,3450 3223,3339 3857,3339 3871,3353 v1(3871,3390)
NetR24_2: R24.2 U8.5 | length 91.3
  Component Side w29.53: U8.5 1624.84,3187.76 R24.2
PD: R11.2 U3.6 | length 184.1
  Component Side w12: v1(3079,3321) 3079.88,3320.12 U3.6
  Solder Side w12: R11.2 v1(3079,3321)
PTT: R9.2 S1.1 U3.5 | length 608.5
  Component Side w12: S1.1@2627.2,3391.42 2902.8,3391.42 2902.8,3222.72 U3.5
  Solder Side w12: R9.2 2902.8,3230.2 S1.1@2902.8,3391.42
RESET: C13.2 R16.2 S2.1 U7.7 | length 1476.5
  Component Side w10: v1@3612.16,3610.16 U7.7
  Component Side w12: v1(3609,3607) v1@3612.16,3610.16 ; C13.2 4011.58,3060.85 S2.1@4011.58,2971.8 ; S2.1@4011.58,2696.2 S2.1@4011.58,2971.8 ; R16.2 4051.19,3011.4 S2.1@4011.58,2971.8
  Solder Side w12: v1(3609,3607) 3593.87,3607 3554,3567.13 3554,3452 3908.58,3097.42 3908.58,3074.8 S2.1@4011.58,2971.8
RF_OUT: J1.1 U3.12 | length 279.3
  Component Side w29.53: J1.1@3255,2138.43 3255,2417.6 U3.12
RX: P2.1 U7.31 | length 563.6
  Component Side w10: U7.31 4143.84,3629.84 4164.5,3650.5
  Component Side w12: 4164.5,3650.5 4164.5,3719.5 P2.1
RXD: U3.16 U7.12 | length 2540.8
  Component Side w12: U3.16 2554.29,2295.29 2525,2266 2333,2266 2306,2293 2306,2598 2742,3034 2815.28,3034 2816.28,3033 3046,3033 3184,3171 3184,3312 3313,3441 3481,3441 3481.5,3440.5 3557.5,3440.5 3628.51,3511.51 U7.12@3685.55,3511.51
SQ: LED1.1 R12.2 U3.1 | length 2133.1
  Component Side w12: LED1.1 1830,2808 1866,2844 2158,2844 2203.9,2889.9 U3.1 2202,3222.72 v1(2202,3339)
  Solder Side w12: v1(2202,3339) 2202,3291 2278,3215 2389,3215 2536,3068 2561,3068 2669.6,2959.4 R12.2
TX: P2.2 U7.30 | length 516.8
  Component Side w10: U7.30 4122.33,3610.16
  Component Side w12: 4122.33,3610.16 4157.16,3610.16 4189,3642 4189,3688 4351,3850 P2.2
TXD: U3.17 U7.13 | length 1992.7
  Component Side w12: U3.17 2379.09,2584.68 2380.09,2585.68 2380.09,2633.09 2745,2998 3201,2998 3330,3127 3330,3259.29 3473.35,3402.65 3678.83,3402.65 U7.13
V_BAT: C11.1 S3.2 U5.1 U5.4 U7.1 | length 2501.1
  Component Side w10: U5.1 1582.6,3937.6 1600,3955 1635,3955 1657.4,3977.4 U5.4 ; S3.2@1731,4275 1994,4275 2027,4308 3198,4308 3328,4178 3473,4178 3658,3993 3658,3755.82 U7.1
  other v1: 1663,4050 1746,4050 1722,4092 1723,4147
V_USB: C14.1 J2.1 R18.2 R23.2 U8.4 | length 387.3
  Component Side w10: R23.2 1385,3140 1390,3145 ; J2.1 1306.57,2821.18 1339,2853.62 v1(1339,2854) ; v1@1360,2575 v1(1360.63,2575.63) R18.2
  other v1: 1380,3000 1380,3045 1380,3090
pads on no net: C1.0 C2.0 C3.0 C4.0 C5.0 C6.0 C7.0 C8.0 C9.0 C10.0 C11.0 C12.0 C13.0 C14.0 C15.0 C16.0 C17.0 C18.0 C19.0 C20.0 C21.0 C22.0 C23.0 C24.0 F1.0 J1. J2.0 J2.4 R18.0 R19.0 R20.0 S1.0 S2.0 S3.3 U1.5 U1.6 U1.7 U3.0 U3.2 U3.4 U3.11 U3.13 U3.14 U3.15 U5.0 U7.2 U7.3 U7.4 U7.10 U7.11 U7.14 U7.15 U7.16 U7.17 U7.20 U7.21 U7.22 U7.29 U7.43 U7.45 U7.46

## Polygon pours and split planes (outlines as drawn)
GND on Component Side "Top Layer-NetH1_1" (solid, remove dead copper, pour order 56): 1000,4420 4505,4420 4505,2060 1000,2060 1000,3690 1075,3690 1075,3995 1000,3995
V_USB on Component Side "Top Layer-NetH1_1" (solid, remove dead copper, pour order 2): 1475,3205 1475,3120 1475,3110 1515,3070 1515,2970 1365,2970 1365,2975 1365,3205 1470,3205
NetC15_1 on Component Side "Top Layer-NetH1_1" (solid, remove dead copper, pour order 6): 1500,3365 1255,3365 1255,3625 1245,3635 1240,3640 1120,3640 1120,3815 1125,3820 1225,3820 1360,3820 1365,3815 1410,3770 1410,3530 1475,3465 1500,3440 1500,3365
NetC15_1 on Component Side "Top Layer-NetH1_1" (solid, remove dead copper, pour order 8): 1650.62,4325 1350,4325 1350,4105 1350,4095 1260,4005 1260,3800 1380,3800 1410,3770 1430,3790 1430,4205 1655.62,4205 1655.62,4325
V_BAT on Component Side "Top Layer-NetH1_1" (solid, remove dead copper, pour order 10): 1685,3980 1685,4320 1760,4320 1760,3980
V_BAT on Component Side "Top Layer-NetH1_1" (solid, remove dead copper, pour order 12): 1645,3990 1645,4080 1650,4075 1720,4075 1720,3980 1645,3980
NetC12_1 on Component Side "Top Layer-NetH1_1" (solid, remove dead copper, pour order 14): 1470,3950 1470,3650 1475,3645 1555,3645 1555,3832 1530,3857 1530,3865 1530,3945 1525,3950
NetL1_1 on Component Side "Top Layer-NetH1_1" (solid, remove dead copper, pour order 16): 1615,3832 1645,3832 1645,3925 1670,3925 1670,3850 1685,3850 1685,3655 1680,3650 1615,3650
GND on Component Side "Top Layer-NetH1_1" (solid, remove dead copper, pour order 18): 1607,3925 1607,3845 1633,3845 1633,3924 1632,3925
NetC12_1 on Component Side "Top Layer-NetH1_1" (solid, remove dead copper, pour order 20): 1470,3650 1470,3549 1470,3546 1473,3543 1476,3540 1786,3540 1788,3540 1802,3554 1801,3555 1801,3813 1699,3813 1700,3812 1700,3619 1556,3619 1555,3619 1555,3618 1555,3650
3.3V on Component Side "Top Layer-NetH1_1" (solid, remove dead copper, pour order 22): 1708,3510 1822,3510 1823,3511 1823,3613 1974,3613 1975,3612 1974,3611 1974,3443 1708,3443 1708,3511
3.3V_A on Component Side "Top Layer-NetH1_1" (solid, remove dead copper, pour order 24): 1819,3377 1970,3377 1969,3376 1969,3309 1821,3309 1819,3307
GND on Component Side "Top Layer-NetH1_1" (solid, remove dead copper, pour order 26): 1720,3912 1798,3912 1799,3912 1807,3920 1807,4028 1807,4030 1808,4031 1879,4031 1879,3832 1880,3831 1720,3831
NetC15_1 on Component Side "Top Layer-NetH1_1" (solid, remove dead copper, pour order 28): 1450,3262 1450,3367 1451,3368 1477,3368 1477,3262
GND on Component Side "Top Layer-NetH1_1" (solid, remove dead copper, pour order 30): 1654,2980 1654,3107 1655,3107 1673,3125 1674,3126 1674,3219 1732,3219 1733,3218 1732,3217 1732,3128 1732,3127 1752,3107 1755,3104 1755,2981 1755,2980
GND on Component Side "Top Layer-NetH1_1" (solid, remove dead copper, pour order 34): 1487,3278 1487,3331 1531,3375 1531,3391 1551,3391 1552,3390 1556,3386 1556,3366 1556,3363 1517,3324 1513,3320 1512,3320 1512,3278 1511,3277
3.3V on Component Side "Top Layer-NetH1_1" (solid, remove dead copper, pour order 36): 3387,3054 3733,3054 3740,3061 3740,3202 3393,3202 3390,3205 3386,3201 3386,3107
GND on Component Side "Top Layer-NetH1_1" (solid, remove dead copper, pour order 42): 3448,2947 3620,2947 3619,2946 3619,2869 3451,2869 3449,2871
GND on Component Side "Top Layer-NetH1_1" (solid, remove dead copper, pour order 44): 3451,2769 3623,2769 3622,2768 3622,2691 3454,2691 3452,2693
GND on Component Side "Top Layer-NetH1_1" (solid, remove dead copper, pour order 46): 2981,2253 3116,2253 3116,2054 3115,2053 3106,2062 2980,2062 2980,2250 2981,2251
GND on Component Side "Top Layer-NetH1_1" (solid, remove dead copper, pour order 48): 3400,2251 3535,2251 3535,2052 3534,2051 3525,2060 3399,2060 3399,2248 3400,2249
GND on Signal Layer 1 "Top Layer-NetH1_1" (solid, remove dead copper, pour order 40): 1000,4420 4495,4422 4495,2066 4502,2059 1008,2059 998.79,2059 1000,2059 1000,3690 1075,3690 1075,3995 1000,3995 998.79,3995
GND on Solder Side "Top Layer-NetH1_1" (solid, remove dead copper, pour order 58): 1000,4420 4505,4420 4505,2060 1000,2060 1000,3690 1075,3690 1075,3995 1000,3995
3.3V on Power Plane (split plane): 4484.9,2080.1 1020.1,2080.1 1020.1,2597.04 1021.08,2596.75 1025,2596.36 1177.57,2596.36 1178.73,2596.47 1181.49,2596.75 1187.58,2597.96 1189.07,2598.41 1191.35,2599.1 1197.08,2601.47 1197.56,2601.73 1200.55,2603.33 1204.9,2606.24 1204.9,2485 1205.29,2483.05 1206.4,2481.4 1208.05,2480.29 1210,2479.9 1505,2479.9 1506.95,2480.29 1508.6,2481.4 1509.71,2483.05 1510.1,2485 1510.1,3220 1509.71,3221.95 1508.6,3223.6 1506.95,3224.71 1505,3225.1 1150,3225.1 1148.05,3224.71 1146.4,3223.6 1145.29,3221.95 1144.9,3220 1144.9,3042.79 1145.29,3040.84 1146.4,3039.19 1149.19,3036.4 1150.84,3035.29 1152.79,3034.9 1254.9,3034.9 1254.9,2992.11 1206.4,2943.6 1205.29,2941.95 1204.9,2940 1204.9,2933.76 1200.55,2936.67 1197.56,2938.27 1197.08,2938.53 1191.35,2940.9 1189.33,2941.51 1187.58,2942.04 1181.49,2943.25 1177.57,2943.64 1025,2943.64 1021.08,2943.25 1020.1,2942.96 1020.1,3669.9 1075,3669.9 1078.92,3670.29 1082.69,3671.43 1086.17,3673.29 1089.21,3675.79 1091.71,3678.83 1093.57,3682.31 1094.71,3686.08 1095.1,3690 1095.1,3845 1095.1,3995 1094.71,3998.92 1093.57,4002.69 1091.71,4006.17 1089.21,4009.21 1086.17,4011.71 1082.69,4013.57 1078.92,4014.71 1075,4015.1 1020.1,4015.1 1020.1,4399.9 4484.9,4399.9
V_USB on Power Plane (split plane): 1499.9,2490.1 1215.1,2490.1 1215.1,2616.04 1215.64,2616.71 1219.09,2621.87 1220.78,2625.03 1220.95,2625.34 1223.32,2631.07 1223.93,2633.09 1224.47,2634.84 1224.47,2634.85 1225.68,2640.93 1226.06,2644.85 1226.06,2647.95 1226.06,2892.05 1226.06,2895.15 1225.68,2899.07 1224.47,2905.15 1224.47,2905.16 1223.93,2906.91 1223.32,2908.93 1220.95,2914.66 1220.78,2914.97 1219.09,2918.13 1215.64,2923.29 1215.1,2923.96 1215.1,2937.89 1263.6,2986.4 1264.71,2988.05 1265.1,2990 1265.1,3040 1264.71,3041.95 1263.6,3043.6 1261.95,3044.71 1260,3045.1 1155.1,3045.1 1155.1,3214.9 1499.9,3214.9
3.3V_A on Power Plane (split plane): 2526.4,3642.4 2528.05,3641.29 2530,3640.9 3076.89,3640.9 3158.4,3559.4 3160.05,3558.29 3162,3557.9 3401,3557.9 3402.95,3558.29 3404.6,3559.4 3452.11,3606.9 3694.89,3606.9 3723.9,3577.89 3723.9,3561.11 3692.89,3530.1 2522,3530.1 2520.05,3529.71 2518.4,3528.6 2299.89,3310.1 1892.39,3310.1 1892.39,3377.9 2001,3377.9 2002.95,3378.29 2004.6,3379.4 2166.6,3541.4 2167.71,3543.05 2168.1,3545 2168.1,3664.89 2199.11,3695.9 2472.89,3695.9

## Other copper
Component Side:
  rectangle net GND: 1216,2614 1309,2725
  rectangle net GND: 1216,2847 1314,2918
Power Plane (plane layer: these items are gaps in the copper):
  lines w10: 1887.29,3381.05 1887.29,3305.29 1887,3305 2302,3305 2522,3525 3448,3525 3695,3525 3729,3559 3729,3580 3697,3612 3576,3612 3450,3612 3401,3563 3162,3563 3079,3646 2530,3646 2475,3701 2197,3701 2163,3667 2163,3545 2001,3383 1892,3383 ; 1150,3042.79 1152.79,3040 1260,3040 1260,2990 1210,2940 1210,2485 1505,2485 1505,3220 1380,3220 1150,3220 1150,3042.79
Multi-Layer:
  lines w1: 8218.2,2587.32 8317.89,2687 8437.89,2807 8557.89,2927 8677.89,3047 8797.89,3167 8917.89,3287 9037.89,3407 9157.89,3527 9277.89,3647 9337.89,3707 ; 8218.2,2647.32 8257.89,2687 8377.89,2807 8497.89,2927 8617.89,3047 8737.89,3167 8857.89,3287 8977.89,3407 9097.89,3527 9217.89,3647 9337.89,3767 ; 8218.2,2707.32 8317.89,2807 8437.89,2927 8557.89,3047 8677.89,3167 8797.89,3287 8917.89,3407 9037.89,3527 9157.89,3647 9277.89,3767 9337.89,3827 ; 8218.2,2767.32 8257.89,2807 8377.89,2927 8497.89,3047 8617.89,3167 8737.89,3287 8857.89,3407 8977.89,3527 9097.89,3647 9217.89,3767 9337.89,3887 ; 8218.2,2827.32 8317.89,2927 8437.89,3047 8557.89,3167 8677.89,3287 8797.89,3407 8917.89,3527 9037.89,3647 9157.89,3767 9277.89,3887 ; 8218.2,2887.32 8257.89,2927 8377.89,3047 8497.89,3167 8617.89,3287 8737.89,3407 8857.89,3527 8977.89,3647 9097.89,3767 9217.89,3887 ; 8218.2,2947.32 8317.89,3047 8437.89,3167 8557.89,3287 8677.89,3407 8797.89,3527 8917.89,3647 9037.89,3767 9157.89,3887 ; 8218.2,3007.32 8257.89,3047 8377.89,3167 8497.89,3287 8617.89,3407 8737.89,3527 8857.89,3647 8977.89,3767 9097.89,3887 ; 8218.2,3067.32 8317.89,3167 8437.89,3287 8557.89,3407 8677.89,3527 8797.89,3647 8917.89,3767 9037.89,3887 ; 8218.2,3127.32 8257.89,3167 8377.89,3287 8497.89,3407 8617.89,3527 8737.89,3647 8857.89,3767 8977.89,3887 ; 8218.2,3187.32 8317.89,3287 8437.89,3407 8557.89,3527 8677.89,3647 8797.89,3767 8917.89,3887 ; 8218.2,3247.32 8257.89,3287 8377.89,3407 8497.89,3527 8617.89,3647 8737.89,3767 8857.89,3887 ; 8218.2,3307.32 8317.89,3407 8437.89,3527 8557.89,3647 8677.89,3767 8797.89,3887 ; 8218.2,3367.32 8257.89,3407 8377.89,3527 8497.89,3647 8617.89,3767 8737.89,3887 ; 8218.2,3427.32 8317.89,3527 8437.89,3647 8557.89,3767 8677.89,3887 ; 8218.2,3487.32 8257.89,3527 8377.89,3647 8497.89,3767 8617.89,3887 ; 8218.2,3547.32 8317.89,3647 8437.89,3767 8557.89,3887 ; 8218.2,3607.32 8257.89,3647 8377.89,3767 8497.89,3887 ; 8218.2,3667.32 8317.89,3767 8437.89,3887 ; 8218.2,3727.32 8257.89,3767 8377.89,3887 ; 8218.2,3787.32 8317.89,3887 ; 8218.2,3847.32 8257.89,3887 ; 8257.89,2567 8377.89,2687 8497.89,2807 8617.89,2927 8737.89,3047 8857.89,3167 8977.89,3287 9097.89,3407 9217.89,3527 9337.89,3647 ; 8317.89,2567 8437.89,2687 8557.89,2807 8677.89,2927 8797.89,3047 8917.89,3167 9037.89,3287 9157.89,3407 9277.89,3527 9337.89,3587 ; 8377.89,2567 8497.89,2687 8617.89,2807 8737.89,2927 8857.89,3047 8977.89,3167 9097.89,3287 9217.89,3407 9337.89,3527 ; 8437.89,2567 8557.89,2687 8677.89,2807 8797.89,2927 8917.89,3047 9037.89,3167 9157.89,3287 9277.89,3407 9337.89,3467 ; 8497.89,2567 8617.89,2687 8737.89,2807 8857.89,2927 8977.89,3047 9097.89,3167 9217.89,3287 9337.89,3407 ; 8557.89,2567 8677.89,2687 8797.89,2807 8917.89,2927 9037.89,3047 9157.89,3167 9277.89,3287 9337.89,3347 ; 8617.89,2567 8737.89,2687 8857.89,2807 8977.89,2927 9097.89,3047 9217.89,3167 9337.89,3287 ; 8677.89,2567 8797.89,2687 8917.89,2807 9037.89,2927 9157.89,3047 9277.89,3167 9337.89,3227 ; 8737.89,2567 8857.89,2687 8977.89,2807 9097.89,2927 9217.89,3047 9337.89,3167 ; 8797.89,2567 8917.89,2687 9037.89,2807 9157.89,2927 9277.89,3047 9337.89,3107 ; 8857.89,2567 8977.89,2687 9097.89,2807 9217.89,2927 9337.89,3047 ; 8917.89,2567 9037.89,2687 9157.89,2807 9277.89,2927 9337.89,2987 ; 8977.89,2567 9097.89,2687 9217.89,2807 9337.89,2927 ; 9037.89,2567 9157.89,2687 9277.89,2807 9337.89,2867 ; 9097.89,2567 9217.89,2687 9337.89,2807 ; 9157.89,2567 9277.89,2687 9337.89,2747 ; 9217.89,2567 9337.89,2687 ; 9277.89,2567 9337.89,2627
  lines w15: 4789.09,2687 5199,2687 6138.74,2687 6998.51,2687 7648.34,2687 8218.2,2687 9337.89,2687 ; 4789.09,2807 5199,2807 6138.74,2807 6998.51,2807 7648.34,2807 8218.2,2807 9337.89,2807 ; 4789.09,2927 5199,2927 6138.74,2927 6998.51,2927 7648.34,2927 8218.2,2927 9337.89,2927 ; 4789.09,3047 5199,3047 6138.74,3047 6998.51,3047 7648.34,3047 8218.2,3047 9337.89,3047 ; 4789.09,3167 5199,3167 6138.74,3167 6998.51,3167 7648.34,3167 8218.2,3167 9337.89,3167 ; 4789.09,3287 5199,3287 6138.74,3287 6998.51,3287 7648.34,3287 8218.2,3287 9337.89,3287 ; 4789.09,3407 5199,3407 6138.74,3407 6998.51,3407 7648.34,3407 8218.2,3407 9337.89,3407 ; 4789.09,3527 5199,3527 6138.74,3527 6998.51,3527 7648.34,3527 8218.2,3527 9337.89,3527 ; 4789.09,3647 5199,3647 6138.74,3647 6998.51,3647 7648.34,3647 8218.2,3647 9337.89,3647 ; 4789.09,3767 5199,3767 6138.74,3767 6998.51,3767 7648.34,3767 8218.2,3767 9337.89,3767 ; 4789.09,3887 9337.89,3887 ; 5199,4007 5199,2567 ; 6138.74,4007 6138.74,2567 ; 6998.51,4007 6998.51,2567 ; 7648.34,4007 7648.34,2567 ; 8218.2,4007 8218.2,2567 ; 5199,2567 4789.09,2567 4789.09,4007 9337.89,4007 9337.89,2567 8218.2,2567 ; 5199,2567 6138.74,2567 ; 6138.74,2567 6998.51,2567 ; 6998.51,2567 7648.34,2567 ; 7648.34,2567 8218.2,2567
  text "Layer" at 4849.09,3917 h60
  text "Name" at 5259,3917 h60
  text "Material" at 6198.74,3917 h60
  text "Thickness" at 7058.51,3917 h60
  text "Constant" at 7708.34,3917 h60
  text "Board Layer Stack" at 8278.2,3917 h60
  text "1" at 4849.09,3797 h60
  text "Top Overlay" at 5259,3797 h60
  text "2" at 4849.09,3677 h60
  text "Top Solder" at 5259,3677 h60
  text "Solder Resist" at 6198.74,3677 h60
  text "0.010mm" at 7058.51,3677 h60
  text "3.5" at 7708.34,3677 h60
  text "3" at 4849.09,3557 h60
  text "Component Side" at 5259,3557 h60
  text "Copper" at 6198.74,3557 h60
  text "0.036mm" at 7058.51,3557 h60
  text "4" at 4849.09,3437 h60
  text "Dielectric 1" at 5259,3437 h60
  text "FR-4" at 6198.74,3437 h60
  text "0.320mm" at 7058.51,3437 h60
  text "4.8" at 7708.34,3437 h60
  text "5" at 4849.09,3317 h60
  text "Signal Layer 1" at 5259,3317 h60
  text "Copper" at 6198.74,3317 h60
  text "0.036mm" at 7058.51,3317 h60
  text "6" at 4849.09,3197 h60
  text "Dielectric 3" at 5259,3197 h60
  text "0.127mm" at 7058.51,3197 h60
  text "4.2" at 7708.34,3197 h60
  text "7" at 4849.09,3077 h60
  text "Power Plane" at 5259,3077 h60
  text "Copper" at 6198.74,3077 h60
  text "0.036mm" at 7058.51,3077 h60
  text "8" at 4849.09,2957 h60
  text "Dielectric 4" at 5259,2957 h60
  text "0.254mm" at 7058.51,2957 h60
  text "4.2" at 7708.34,2957 h60
  text "9" at 4849.09,2837 h60
  text "Solder Side" at 5259,2837 h60
  text "Copper" at 6198.74,2837 h60
  text "0.036mm" at 7058.51,2837 h60
  text "10" at 4849.09,2717 h60
  text "Bottom Solder" at 5259,2717 h60
  text "Solder Resist" at 6198.74,2717 h60
  text "0.010mm" at 7058.51,2717 h60
  text "3.5" at 7708.34,2717 h60
  text "11" at 4849.09,2597 h60
  text "Bottom Overlay" at 5259,2597 h60

## Silkscreen, mask and mechanical layers (free items; w line width, h text height)
Top Paste:
  rectangle: 1910,2441 2091,2792
  rectangle: 1910,2934 2091,3198
Top Solder:
  rectangle: 1469,3655 1555,3832
  rectangle: 1615,3659 1686,3832
  rectangle: 1908,2934 2091,3196
  rectangle: 1910,2441 2091,2792
Mechanical 1:
  lines w10: 995,2062 999,2058 4499,2058 4503,2062 4503,4419 4505,4421 999,4421 999,3995 1073,3995 1075,3993 1075,3691 995,3691 995,2062 ; 1029,2621 1185.45,2621 1201,2636.55 1201,2902.55 1184.55,2919 1029,2919 1029,2621
Mechanical 15:
  circle w10: c4245,4185 r59.03
  circle w10: c4245,4185 r78.71
  circle w10: c1240,2295 r58.9
  circle w10: c1240,2295 r78.72
  circle w10: c1240,4185 r58.82
  circle w10: c1240,4185 r78.75
  circle w10: c4245,2295 r58.82
  circle w10: c4245,2295 r79

## Dimensions
4245,2295 to 5034,2192 on Mechanical 15
4245,2295 to 4682,2043 on Mechanical 15
1423.15,4542.72 to 1817,4554 on Mechanical 15
2005,4096.18 to 2525,4096.18 on Mechanical 15
3454,1687 to 3056.18,1696.05 on Mechanical 15
1240,2295 to 1240,4185 on Mechanical 15
1000,4420 to 999,2058 on Mechanical 15
1240,4185 to 4245,4185 on Mechanical 15
4505,4420 to 1000,4420 on Mechanical 15

## Text inside footprints (layer, text, board x,y; h text height)
J1: Mechanical 3 "Board Edge" at 3573.9,2074 h7.87 r180
LED1: Top Overlay "K" at 1880,2285 h30 r90; Mechanical 15 "K" at 1880,2285 h30 r90
LED2: Top Overlay "K" at 1625,2285 h30 r90; Mechanical 15 "K" at 1625,2285 h30 r90
LED3: Top Overlay "K" at 1175,3395 h30 r90; Mechanical 15 "K" at 1175,3395 h30 r90